# Altium PCB Main PCB.PcbDoc
Units mm, origin at the board's own origin, x right, y up, seen from the top; angles counter-clockwise.
Board outline 76.71 x 60.83 mm, 2 copper layers (Top Layer, Bottom Layer); 25 components, 35 nets, 101 pads, 57 vias.
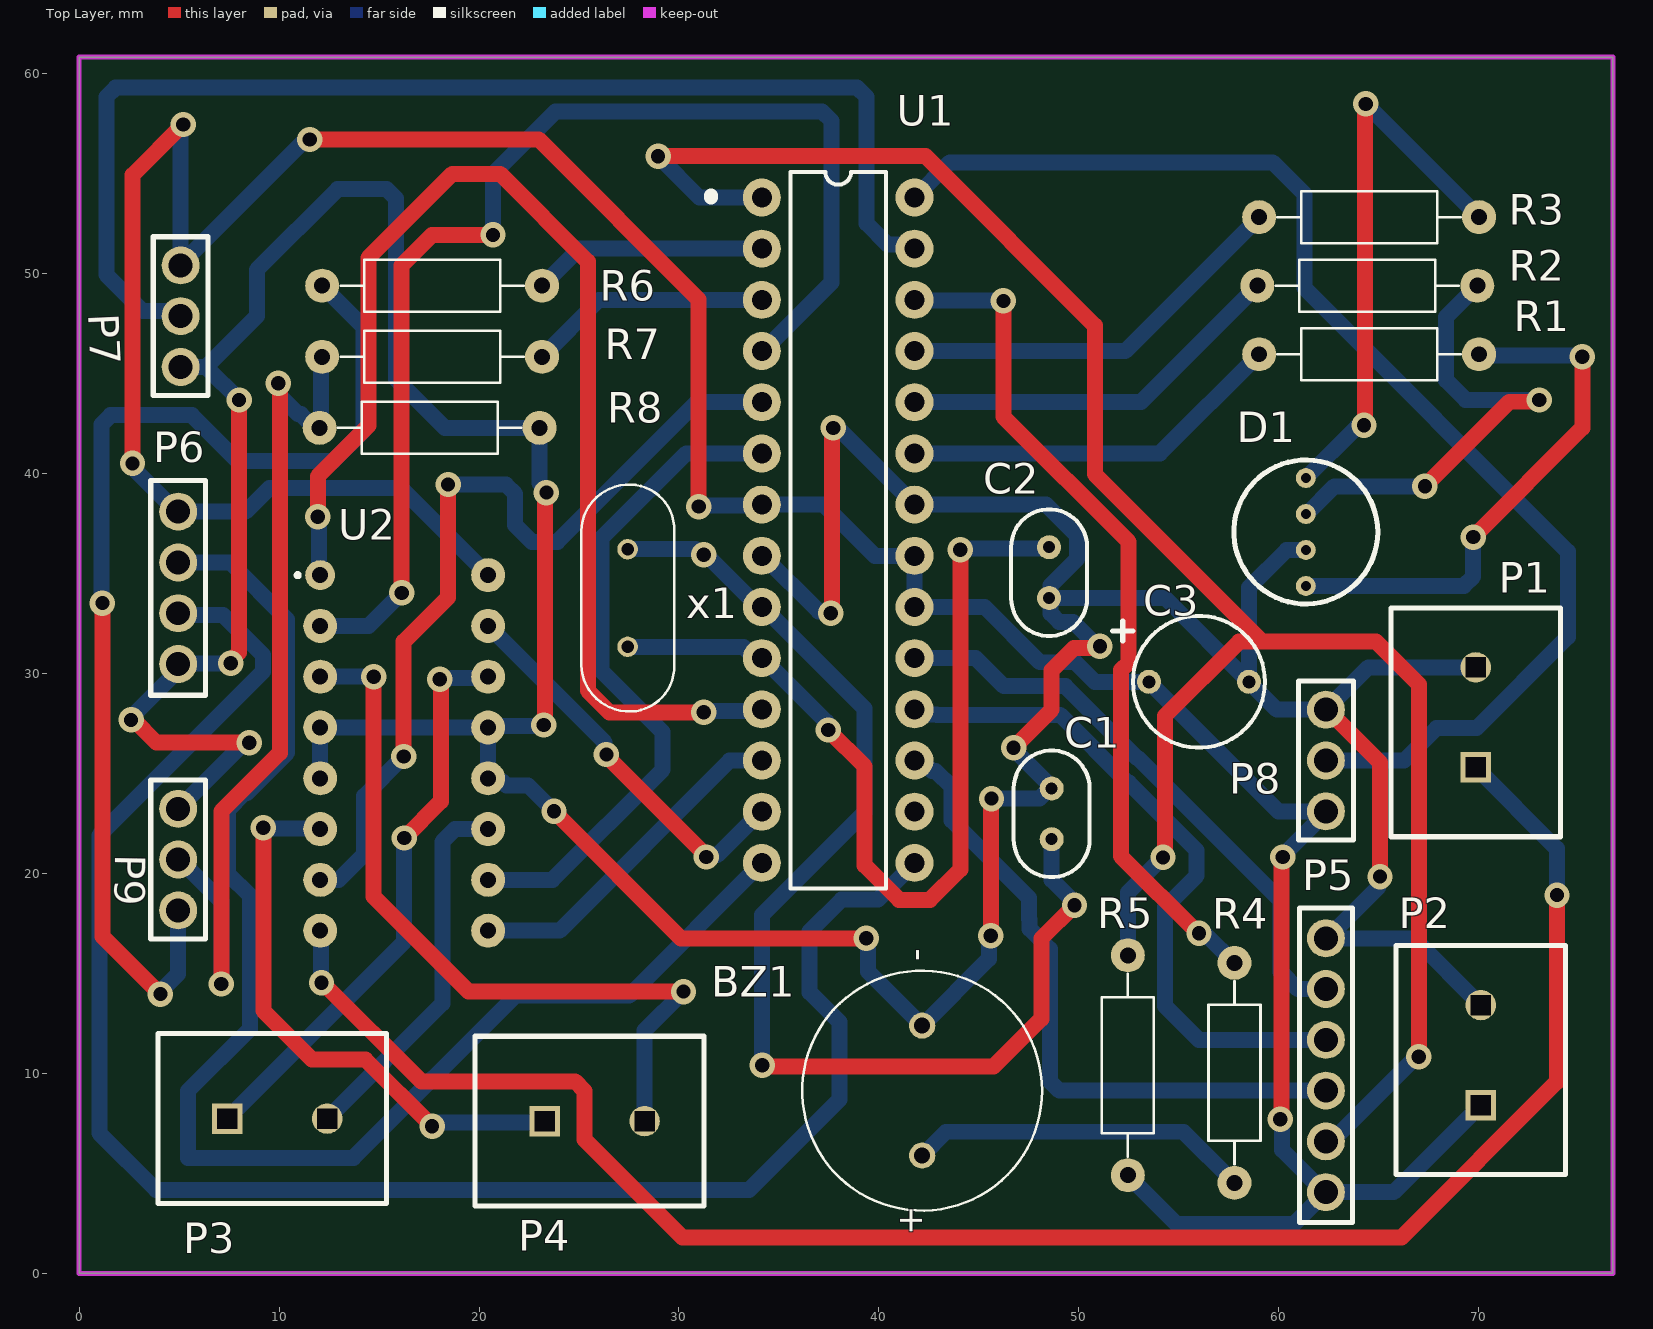
[diagram p0: Top Layer view]
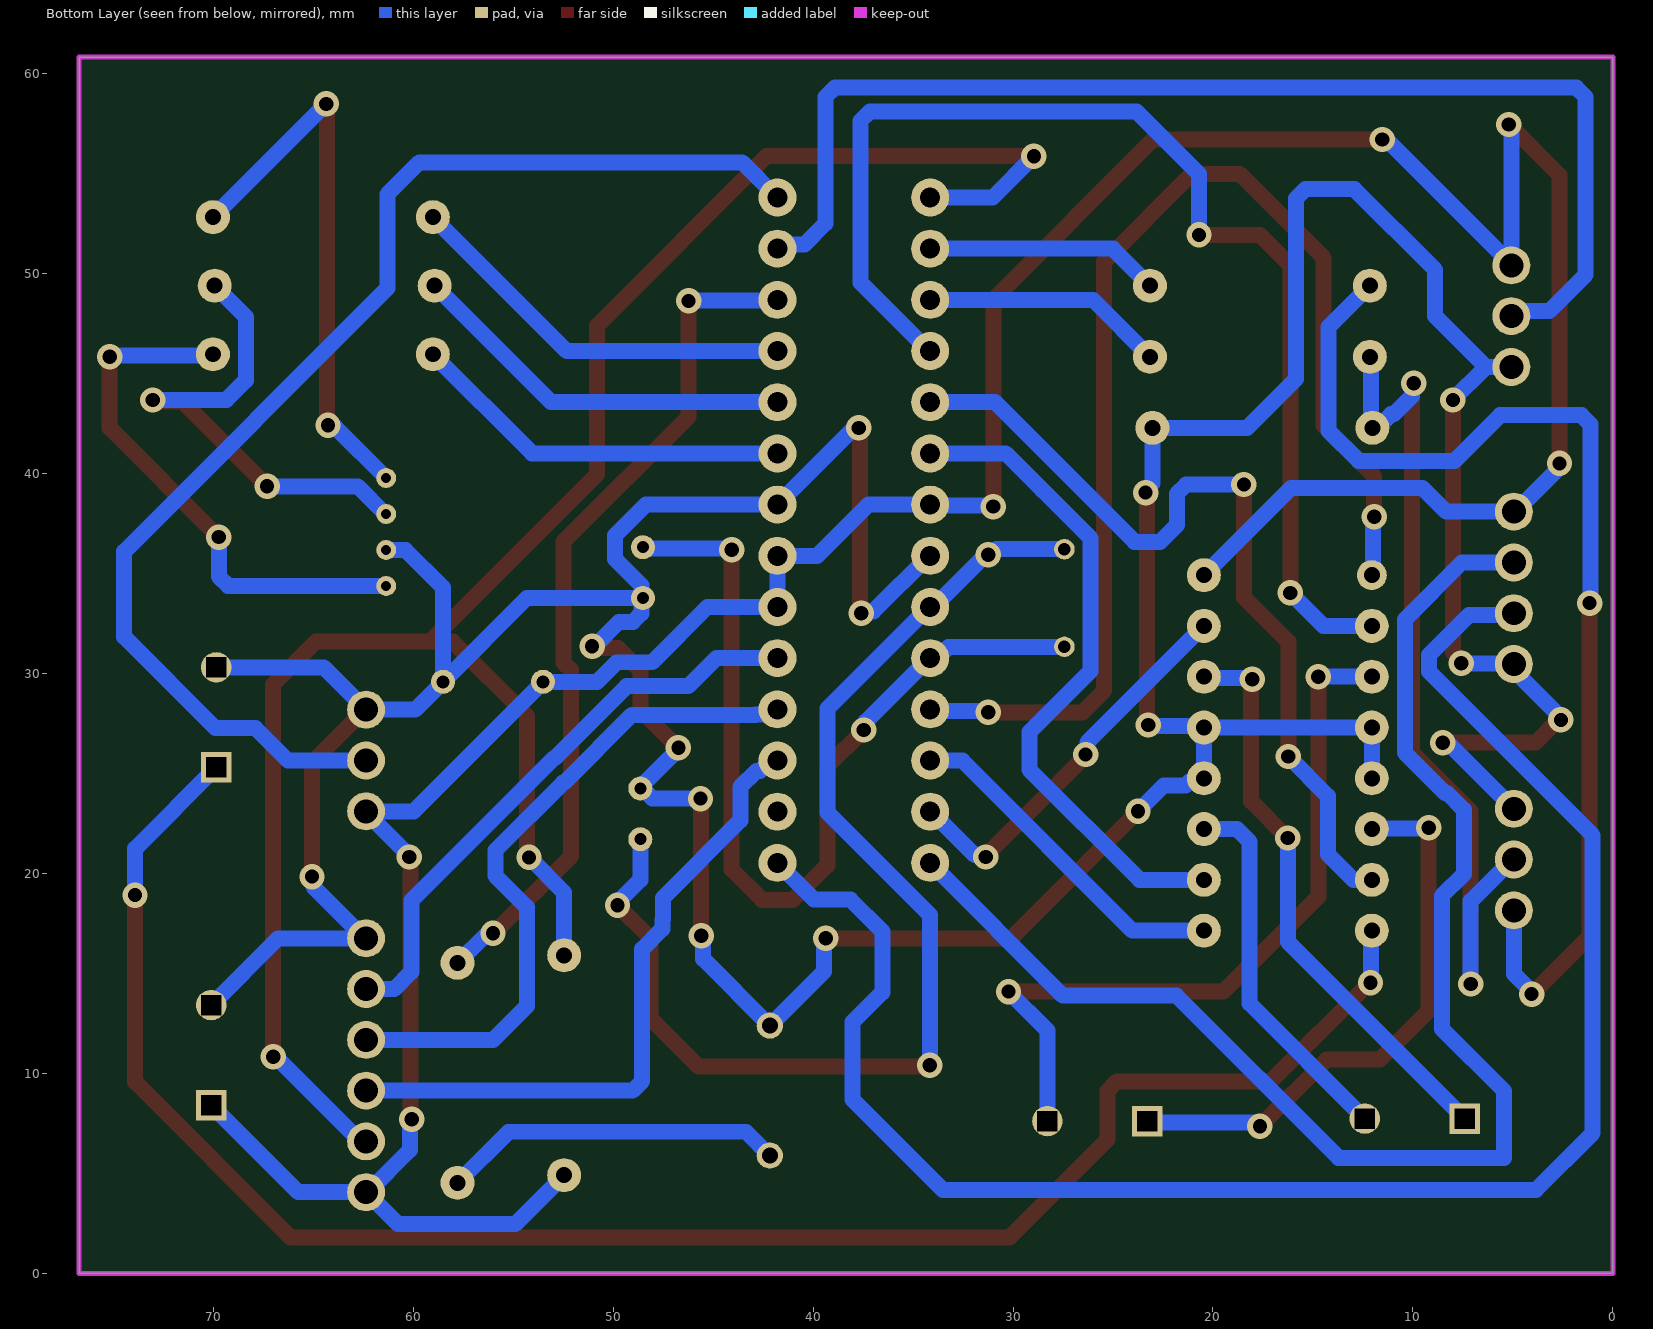
[diagram p1: Bottom Layer view, seen from below]
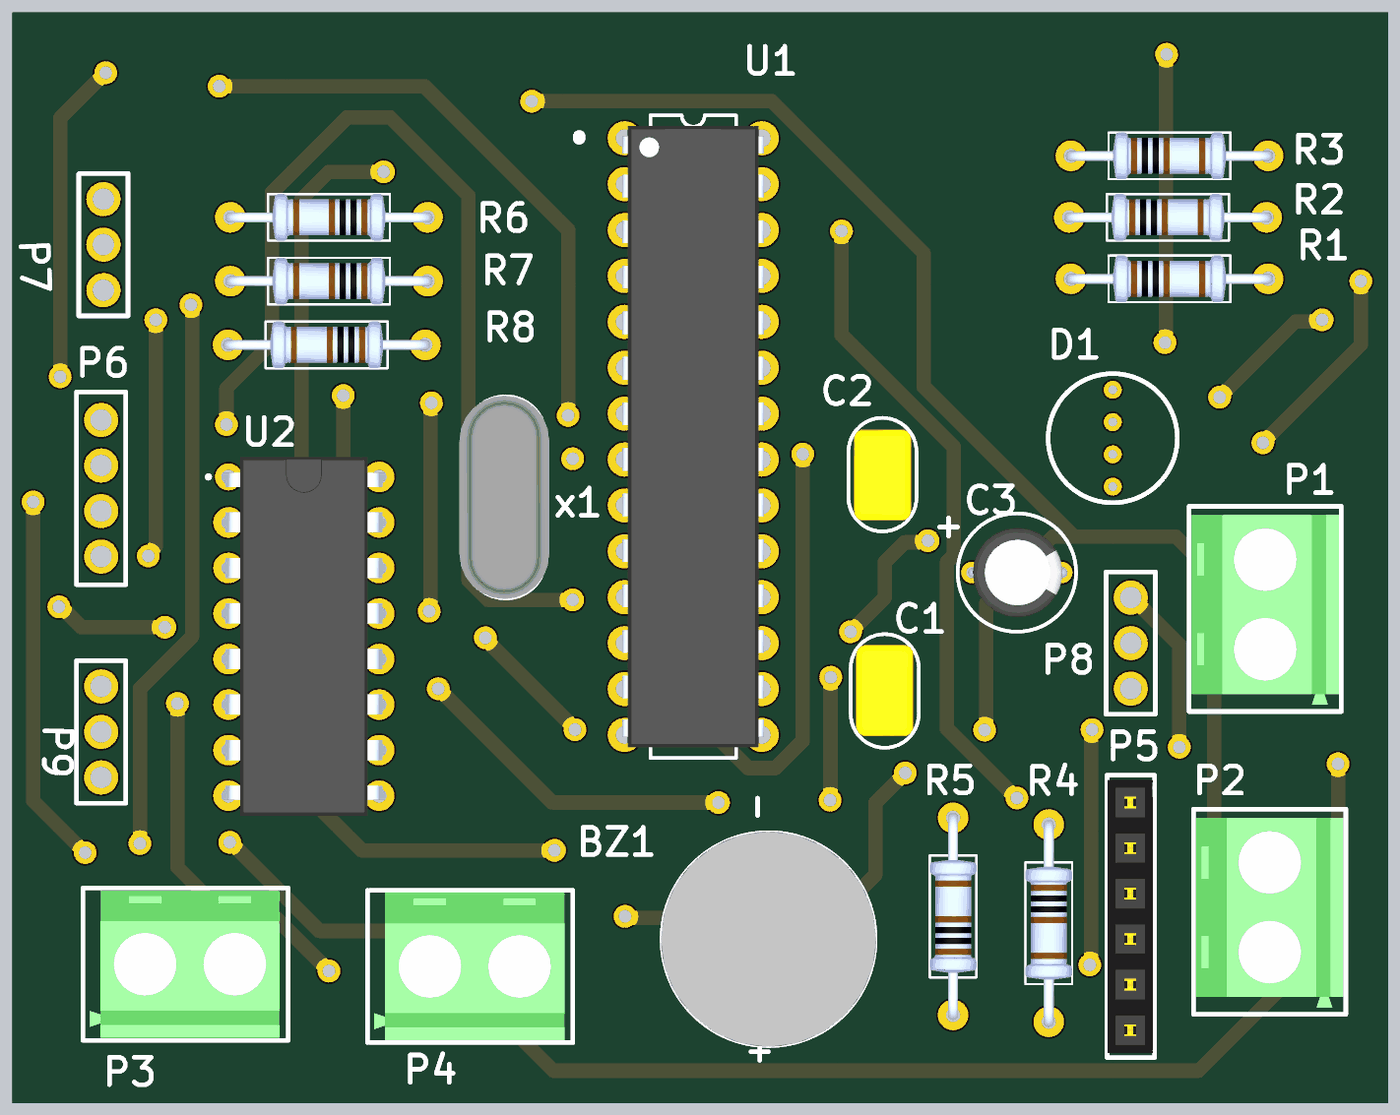
[diagram p2: 3D render of the assembled board from above, using the file's embedded part models]

## Layer stack, top to bottom
Top Solder: solder mask 0.0102, Solder Resist, Dk 3.5
Top Layer: signal copper 0.0356
Dielectric 1: dielectric 0.32, FR-4, Dk 4.8
Bottom Layer: signal copper 0.0356
Bottom Solder: solder mask 0.0102, Solder Resist, Dk 3.5

## Board outline
0,0 0,60.833 76.708,60.833 76.708,0

## Design rules (kind name [scope] priority, off if disabled: settings)
Clearance [All] p1: gap=0.4 ignorepadtopadclearanceinfootprint=FALSE
PolygonConnect [All] p1: connectstyle=Relief reliefconductorwidth=0.254 reliefentries=4 polygonreliefangle="90 Angle" airgapwidth=0.254
RoutingVias [All] p1: holewidth=0.711 width=1.27 viastyle="Through Hole" minholewidth=0.711 minwidth=1.27 maxholewidth=0.711 maxwidth=1.27
SolderMaskExpansion [All] p1: expansion=0.102 istentingtop=FALSE
Width [All] p1: maxlimit=0.8 minlimit=0.8 preferedwidth=0.8 minimp=50.000000 maximp=50.000000 favimp=50.000000
30 further rules are at their usual default settings.

## Components (designator, comment, footprint, x,y, rotation, side; value= is the part's Value field where it differs from the comment)
BZ1 "BUZZER" BUZZER 42.164,9.144 r90 top
C1 "Capacitor" CAPACITOR 48.641,22.987 r270 top
C2 "Capacitor" CAPACITOR 48.514,35.052 r90 top
C3 "Polarized cap" "POL CAP" 56.007,29.591 r0 top
D1 "RGB" RGB 61.352,37.084 r90 top
P1 "Terminal block" "TERMINAL BLOCK" 69.85,27.813 r90 top
P2 "Terminal block" "TERMINAL BLOCK" 70.104,10.922 r90 top
P3 "Terminal block" "TERMINAL BLOCK" 9.906,7.747 r0 top
P4 "Terminal block" "TERMINAL BLOCK" 25.781,7.62 r0 top
P5 "6 pins" "6 Pins connector" 62.357,10.414 r270 top
P6 "4 pins" "4 pins connector" 4.953,34.29 r90 top
P7 "3 pins" "3 pins connector" 5.08,47.879 r270 top
P8 "3 pins" "3 pins connector" 62.357,25.654 r90 top
P9 "3 pins" "3 pins connector" 4.953,20.701 r90 top
R1 "Resistor" RESISTOR 64.516,45.974 r0 top
R2 "Resistor" RESISTOR 64.428,49.403 r0 top
R3 "Resistor" RESISTOR 64.516,52.832 r0 top
R4 "Resistor" RESISTOR 57.785,10.033 r270 top
R5 "Resistor" RESISTOR 52.451,10.414 r90 top
R6 "Resistor" RESISTOR 17.653,49.403 r180 top
R7 "Resistor" RESISTOR 17.653,45.847 r180 top
R8 "Resistor" RESISTOR 17.526,42.291 r180 top
U1 "ATmega328P" ATmega328P 37.963,37.174 r0 top
U2 "L293d" L293d 16.256,26.035 r0 top
x1 "Crystal" CRYSTAL 27.432,33.782 r90 top

## Footprints (in the part's own frame and the unit in brackets; to place one, negate y for a bottom-side part, rotate by r counter-clockwise, add the part's x,y. Pads: shape width x height; smd on the part's side, far side on the other; paste and mask are expansions set on the pad)
"3 pins connector" [mm] "3 pins connector"
  round 1.9 hole 1.2: 1(-2.54,0) 2(0,0) 3(2.54,0)
  silkscreen extent -3.97,-1.37 3.97,1.37
"4 pins connector" [mm] "4 pins connector"
  round 1.9 hole 1.2: 1(-3.81,0) 2(-1.27,0) 3(1.27,0) 4(3.81,0)
  silkscreen extent -5.37,-1.37 5.37,1.37
"6 Pins connector" [mm] "6 pins connector"
  round 1.9 hole 1.2: 1(-6.35,0) 2(-3.81,0) 3(-1.27,0) 4(1.27,0) 5(3.81,0) 6(6.35,0)
  silkscreen extent -7.87,-1.32 7.87,1.32, body extent -7.62,-1.3 7.62,1.24, height 8.7
ATmega328P [mm] "IC base"
  round 1.9 hole 1: 1(-3.82,16.64) 2(-3.82,14.08) 3(-3.82,11.52) 4(-3.82,8.96) 5(-3.82,6.4) 6(-3.82,3.84) 7(-3.82,1.28) 8(-3.82,-1.28) 9(-3.82,-3.84) 10(-3.82,-6.4) 11(-3.82,-8.96) 12(-3.82,-11.52) 13(-3.82,-14.08) 14(-3.82,-16.64) 15(3.82,-16.64) 16(3.82,-14.08) 17(3.82,-11.52) 18(3.82,-8.96) 19(3.82,-6.4) 20(3.82,-3.84) 21(3.82,-1.28) 22(3.82,1.28) 23(3.82,3.84) 24(3.82,6.4) 25(3.82,8.96) 26(3.82,11.52) 27(3.82,14.08) 28(3.82,16.64)
  silkscreen extent -6.36,-17.92 2.39,17.92, body extent -3.95,-17.34 3.95,17.34, height 4.57
BUZZER [mm] "buzzer"
  round 1.308 hole 0.8: M(3.25,0) P(-3.25,0)
  silkscreen extent -6,-6 6,6, body extent -6,-6 6,6, height 10
CAPACITOR [mm] "capacitor"
  round 1.2 hole 0.6: 1(-1.27,0) 2(1.27,0)
  silkscreen extent -3.17,-1.9 3.17,1.9, body extent -2.56,-1.59 2.52,1.59, height 6.08
CRYSTAL [mm] "crystal"
  round 1.03 hole 0.63: 1(-2.44,0) 2(2.44,0)
  silkscreen extent -5.68,-2.33 5.68,2.33, body extent -5.67,-2.5 5.68,2.5, height 13.66
L293d [mm] "L293d motor driver"
  round 1.5 hole 0.8: 1(-4.2,8.89)
  round 1.7 hole 0.8: 2(-4.2,6.35) 3(-4.2,3.81) 4(-4.2,1.27) 5(-4.2,-1.27) 6(-4.2,-3.81) 7(-4.2,-6.35) 8(-4.2,-8.89) 9(4.2,-8.89) 10(4.2,-6.35) 11(4.2,-3.81) 12(4.2,-1.27) 13(4.2,1.27) 14(4.2,3.81) 15(4.2,6.35) 16(4.2,8.89)
  silkscreen extent -5.42,8.79 -5.23,8.99, body extent -4.62,-10 4.62,10, height 5.1
"POL CAP" [mm] "polarized capacitor"
  round 1.2 hole 0.65: 1(-2.5,0) 2(2.5,0)
  silkscreen extent -4.31,-3.3 3.3,3.3, body extent -2.71,-2.5 2.79,2.5, height 12.5
RESISTOR [mm]
  round 1.7 hole 0.8: 1(-5.5,0) 2(5.5,0)
  silkscreen extent -4.58,-1.3 4.58,1.3, body extent -5.77,-1.3 5.77,1.3, height 2.6
RGB [mm] "RGB led indicator"
  round 1 hole 0.5: 1(-2.7,0) 2(-0.9,0) 3(0.9,0) 4(2.7,0)
  silkscreen extent -3.6,-3.6 3.6,3.6
"TERMINAL BLOCK" [mil] "terminal block"
  rect 60x60 hole 39.37 square: 1(-98.43,0)
  round 60 hole 39.37 square: 2(98.43,0)
  silkscreen extent -235,-167 215,167, body extent -220,-161 197,161, height 394

## Via types
v1: diameter 1.27, hole 0.712, Top Layer to Bottom Layer, 57 vias

## Nets (pads, with @x,y where several pads share a name; then routed paths per layer and width w, separated by ;. In a path a pad name is that pad's centre, name@x,y a point inside that pad or via, vN(x,y) a via of type N, cw(c..) or ccw(c..) an arc to the next point about the centre after c; other vN are vias at no path point)
+5: C3.1 P2.1 P5.6 P6.4 P7.1 P8.1 R5.1 U1.7 U1.20 U1.21 U2.16 | length 170.2
  Top Layer w0.8: v1(2.667,40.513) 2.667,54.927 v1(5.207,57.467) ; P6.4@4.889,38.1 P6.4 ; P7.1@5.016,50.482 P7.1 ; v1(11.536,56.716) 22.982,56.716 30.988,48.71 v1(30.988,38.354) ; U1.7@34.093,38.404 U1.7 ; v1(60.071,7.709) 60.134,7.772 60.134,20.764 v1(60.198,20.828) ; P5.6@62.281,4.064 P5.6
  Bottom Layer w0.8: v1(2.667,40.513) 2.757,40.423 2.757,40.233 4.889,38.1 8.328,38.1 9.509,39.281 16.1,39.281 U2.16 ; v1(5.207,57.467) 5.207,57.34 5.08,57.213 P7.1 5.08,50.482 11.224,56.626 11.446,56.626 v1(11.536,56.716) ; v1(30.988,38.354) 31.038,38.404 34.093,38.404 U1.7 37.236,38.454 39.796,35.894 U1.21 U1.20 45.282,33.334 48.047,30.569 49.825,30.569 50.803,29.591 C3.1 59.984,23.114 P8.1 62.357,23.05 60.198,20.892 v1(60.198,20.828) ; R5.1 54.901,2.464 60.757,2.464 P5.6 ; v1(60.071,7.709) 60.161,7.619 60.161,6.184 62.281,4.064 P5.6 ; P2.1 65.746,4.064 P5.6
+12: P1.1 U2.8 | length 91.8
  Top Layer w0.8: U2.8 U2.8@12.061,17.141 ; v1(12.123,14.545) 12.171,14.545 17.115,9.601 24.804,9.601 25.273,9.133 25.273,6.704 30.174,1.803 66.141,1.803 73.914,9.577 v1(73.914,18.923)
  Bottom Layer w0.8: U2.8 12.089,17.112 12.089,14.578 v1(12.123,14.545) ; P1.1 73.914,21.249 v1(73.914,18.923)
ASensor: P8.2 U1.28 | length 63.2
  Bottom Layer w0.8: U1.28 43.544,55.575 59.69,55.575 61.29,53.975 61.29,49.276 74.46,36.106 74.46,31.839 69.901,27.28 67.894,27.28 66.269,25.654 P8.2
BLed: R3.1 U1.25 | length 20
  Bottom Layer w0.8: U1.25 52.318,46.134 R3.1
Buzzer: R4.1 U1.26 | length 42.9
  Top Layer w0.8: U1.26 U1.26@41.81,48.668 ; v1(46.228,48.641) 46.228,42.855 52.489,36.594 52.489,30.553 52.107,30.171 52.107,20.877 55.966,17.018 v1(56.007,17.018)
  Bottom Layer w0.8: U1.26 41.81,48.668 46.201,48.668 v1(46.228,48.641) ; v1(56.007,17.018) 56.097,16.928 56.37,16.928 57.765,15.533 R4.1
Echo: P6.2 U1.15 | length 88.2
  Bottom Layer w0.8: P6.2 5.047,32.926 7.203,32.926 9.206,30.923 9.206,30.11 1.01,21.914 1.01,7.019 3.844,4.185 33.509,4.185 38.03,8.706 38.03,12.568 36.538,14.06 36.538,17.104 38.128,18.695 39.944,18.695 U1.15
EN1: U1.11 U2.1 | length 62.5
  Top Layer w0.8: v1(11.938,37.846) 11.938,39.87 14.47,42.401 14.47,50.789 18.672,54.991 21.057,54.991 25.438,50.61 25.438,29.147 26.518,28.067 v1(31.242,28.067) ; U1.11@33.791,28.214 U1.11
  Bottom Layer w0.8: v1(11.938,37.846) 11.997,37.787 11.997,34.984 U2.1 ; v1(31.242,28.067) 31.316,28.141 34.069,28.141 U1.11
EN2: U1.12 U2.9 | length 17.2
  Bottom Layer w0.8: U2.9 24.028,17.145 32.537,25.654 U1.12
GLed: R2.1 U1.24 | length 19.6
  Bottom Layer w0.8: U1.24 53.099,43.574 R2.1
GND: BZ1.M C1.1 C2.1 C3.2 D1.2 P1.2 P2.2 P5.1 P6.1 P7.3 P8.3 P9.3 R8.1 U1.8 U1.22 U2.4 U2.5 U2.12 U2.13 | length 244.5
  Top Layer w0.8: v1(2.597,27.686) 2.724,27.686 3.867,26.543 v1(8.509,26.543) ; P9.3 P9.3@5.016,23.241 ; v1(7.583,30.517) 7.583,30.644 8.001,31.062 v1(8.001,43.688) ; U2.13 U2.13@20.519,27.368 ; R8.1@23.026,42.047 R8.1 ; v1(23.241,27.432) 23.304,27.495 23.304,38.989 v1(23.368,39.053) ; v1(23.749,23.114) 30.099,16.764 v1(39.37,16.764) ; U1.8 U1.8@34.183,35.854 ; v1(37.592,33.02) 37.655,33.084 37.655,42.227 v1(37.719,42.291) ; BZ1.M BZ1.M@42.265,12.394 ; v1(45.593,16.891) 45.612,16.91 45.612,23.73 v1(45.631,23.749) ; v1(46.736,26.289) 48.641,28.194 48.641,28.864 48.641,28.875 48.641,30.169 49.751,31.279 50.964,31.279 v1(51.054,31.369) ; C2.1 C2.1@48.578,33.718 ; C1.1 C1.1@48.641,24.32 ; P5.1 P5.1@62.42,16.764 ; P8.3 62.433,28.194 65.061,25.566 v1(65.061,19.849)
  Bottom Layer w0.8: v1(2.597,27.686) 2.597,27.813 4.953,30.169 P6.1 4.971,30.498 7.565,30.498 v1(7.583,30.517) ; P9.3 8.165,26.453 8.419,26.453 v1(8.509,26.543) ; P7.3 6.35,45.339 8.89,47.879 8.89,50.19 12.929,54.229 15.381,54.229 15.85,53.76 15.85,44.729 18.288,42.291 R8.1 23.026,39.522 23.368,39.18 v1(23.368,39.053) ; 6.413,45.276 v1(8.001,43.688) ; U2.5 U2.4 U2.13 ; v1(23.241,27.432) 23.177,27.368 20.519,27.368 U2.13 ; v1(23.749,23.114) 22.459,24.404 21.375,24.404 21.185,24.593 20.628,24.593 U2.12 U2.13 ; U1.8 34.199,35.894 36.983,33.11 37.502,33.11 v1(37.592,33.02) ; v1(37.719,42.291) 37.809,42.201 38.036,42.201 U1.22 48.362,38.454 49.914,36.902 49.914,35.742 48.591,34.419 48.591,33.859 C2.1 ; v1(39.37,16.764) 39.46,16.674 39.46,15.098 BZ1.M 45.503,15.733 45.503,16.801 v1(45.593,16.891) ; v1(45.631,23.749) 48.025,23.749 48.596,24.32 48.641,24.32 46.736,26.226 v1(46.736,26.289) ; v1(51.054,31.369) 50.927,31.369 49.714,32.582 49.017,32.582 48.591,33.008 48.591,33.705 C2.1 ; D1.2 60.39,36.184 58.507,34.301 C3.2 ; P5.1 P5.1@62.42,16.764 ; v1(65.061,19.849) 64.971,19.759 64.971,19.315 P5.1@62.42,16.764 ; P1.2 64.476,30.313 P8.3 59.904,28.194 C3.2 ; P2.2 66.762,16.764 P5.1@62.42,16.764 ; C2.1 54.316,33.782 C3.2
IN1: U1.4 U2.2 | length 60.8
  Top Layer w0.8: v1(16.129,34.036) 16.129,50.419 17.653,51.943 v1(20.701,51.943)
  Bottom Layer w0.8: U2.2 14.478,32.385 v1(16.129,34.036) ; v1(20.701,51.943) 20.701,54.991 23.819,58.109 37.161,58.109 37.63,57.64 37.63,49.565 34.199,46.134 U1.4
IN2: U1.5 U2.7 | length 43.7
  Top Layer w0.8: v1(16.231,25.857) 16.231,31.595 18.453,33.817 v1(18.453,39.459)
  Bottom Layer w0.8: U2.7 12.979,19.685 14.249,20.955 14.249,23.876 v1(16.231,25.857) ; v1(18.453,39.459) 21.337,39.459 21.806,38.99 21.806,37.43 22.647,36.589 23.914,36.589 30.899,43.574 U1.5
IN3: U1.6 U2.10 | length 33.6
  Bottom Layer w0.8: U2.10 23.673,19.685 29.185,25.197 29.185,27.073 26.117,30.141 26.117,36.767 28.542,39.192 30.364,41.014 U1.6
IN4: U1.13 U2.15 | length 19.9
  Top Layer w0.8: v1(26.371,25.953) 26.371,25.889 31.369,20.892 v1(31.369,20.828) ; U1.13@34.013,23.094 U1.13
  Bottom Layer w0.8: U2.15 26.281,26.56 26.281,26.043 v1(26.371,25.953) ; v1(31.369,20.828) 31.459,20.918 31.911,20.918 34.087,23.094 U1.13
MISO: P5.3 U1.18 | length 34.2
  Bottom Layer w0.8: U1.18 42.032,27.965 42.876,27.965 42.902,27.94 49.059,27.94 52.453,24.547 52.496,24.547 55.89,21.153 55.89,19.892 54.318,18.321 54.318,13.372 56.006,11.684 P5.3
MOSI: P5.4 U1.17 | length 33.2
  Bottom Layer w0.8: U1.17 42.135,25.654 42.661,25.127 42.838,25.127 43.633,24.333 43.633,22.658 47.504,18.787 47.504,17.728 47.536,17.696 47.536,17.237 48.552,16.221 48.552,9.613 49.021,9.144 P5.4
NetBZ1_P: BZ1.P R4.2 | length 17.2
  Bottom Layer w0.8: BZ1.P 43.357,7.087 55.231,7.087 R4.2
NetD1_1: D1.1 R1.2 | length 27.1
  Top Layer w0.8: D1.1 D1.1@61.39,34.346 ; v1(69.723,36.83) 75.184,42.291 v1(75.184,45.847)
  Bottom Layer w0.8: D1.1 69.254,34.384 69.723,34.853 v1(69.723,36.83) ; R1.2 70.08,45.91 75.12,45.91 v1(75.184,45.847)
NetD1_3: D1.3 R2.2 | length 24.6
  Top Layer w0.8: D1.3 D1.3@61.357,37.979 ; v1(67.31,39.37) 71.538,43.598 72.935,43.598 v1(73.025,43.688) ; R2.2@69.928,49.315 R2.2
  Bottom Layer w0.8: D1.3 61.39,37.984 62.776,39.37 v1(67.31,39.37) ; R2.2 68.366,47.841 68.366,44.664 69.342,43.688 v1(73.025,43.688)
NetD1_4: D1.4 R3.2 | length 28.2
  Top Layer w0.8: D1.4 D1.4@61.39,39.822 ; v1(64.262,42.418) 64.308,42.464 64.308,58.448 v1(64.354,58.494) ; R3.2 R3.2@70.06,52.832
  Bottom Layer w0.8: D1.4 63.896,42.328 64.172,42.328 v1(64.262,42.418) ; v1(64.354,58.494) R3.2
NetP3_1: P3.1 U2.14 | length 28.9
  Top Layer w0.8: v1(16.256,21.777) 18.091,23.612 18.091,29.662 v1(18.034,29.718)
  Bottom Layer w0.8: P3.1 16.256,16.597 v1(16.256,21.777) ; v1(18.034,29.718) 18.098,29.781 20.392,29.781 U2.14
NetP3_2: P3.2 U2.11 | length 18.8
  Bottom Layer w0.8: P3.2 18.161,13.502 18.161,21.59 18.796,22.225 U2.11
NetP4_1: P4.1 U2.6 | length 28.6
  Top Layer w0.8: v1(9.207,22.288) 9.207,13.145 11.655,10.697 14.322,10.697 v1(17.653,7.366)
  Bottom Layer w0.8: v1(9.207,22.288) 9.239,22.257 12.024,22.257 U2.6 ; v1(17.653,7.366) 17.78,7.366 17.971,7.556 22.919,7.556 22.983,7.62 P4.1
NetP4_2: P4.2 U2.3 | length 38.4
  Top Layer w0.8: v1(14.732,29.845) 14.732,18.847 19.482,14.097 v1(30.226,14.097)
  Bottom Layer w0.8: U2.3 v1(14.732,29.845) ; P4.2 28.281,12.152 v1(30.226,14.097)
NetR6_1: R6.1 U1.2 | length 11.8
  Bottom Layer w0.8: R6.1 25.004,51.254 U1.2
NetR7_1: R7.1 U1.3 | length 12.2
  Bottom Layer w0.8: R7.1 26,48.694 U1.3
RESET: P5.5 R5.2 U1.1 | length 103.7
  Top Layer w0.8: v1(28.956,55.88) 42.333,55.88 50.803,47.411 50.803,39.977 59.182,31.598 ; R5.2 R5.2@52.471,15.914 ; v1(54.207,20.806) 54.297,20.896 54.297,27.881 58.014,31.598 59.182,31.598 ; P5.5 P5.5@62.42,6.667 ; v1(67.004,10.832) 67.004,29.465 64.872,31.598 59.182,31.598
  Bottom Layer w0.8: v1(28.956,55.88) 31.022,53.814 U1.1 ; R5.2 52.451,19.05 v1(54.207,20.806) ; P5.5 62.649,6.604 66.877,10.832 v1(67.004,10.832)
RLed: R1.1 U1.23 | length 19.3
  Bottom Layer w0.8: U1.23 54.056,41.014 R1.1
Rx: P9.1 R6.2 | length 57.4
  Top Layer w0.8: v1(1.162,33.528) 1.162,16.856 4.048,13.97 v1(4.064,13.97) ; P9.1@4.889,18.224 P9.1
  Bottom Layer w0.8: v1(1.162,33.528) 1.105,33.585 1.105,42.457 1.574,42.926 5.633,42.926 7.918,40.641 12.709,40.641 14.224,42.156 14.224,47.332 R6.2 ; v1(4.064,13.97) 4.064,14.097 4.953,14.986 P9.1
SCK: P5.2 U1.19 | length 29.5
  Bottom Layer w0.8: U1.19 44.842,30.774 46.247,29.369 49.328,29.369 52.95,25.747 52.993,25.747 60.096,18.644 60.096,15.088 60.96,14.224 P5.2
Trig: P6.3 U1.14 | length 71.4
  Bottom Layer w0.8: P6.3 7.544,35.56 10.406,32.698 10.406,26.046 8.401,24.041 8.296,24.041 7.455,23.2 7.455,19.972 8.547,18.88 8.547,12.23 5.444,9.127 5.444,5.785 13.716,5.785 21.825,13.894 27.503,13.894 U1.14
Tx: P9.2 R7.2 R8.2 | length 45.5
  Top Layer w0.8: v1(7.112,14.478) 7.112,23.117 10.033,26.038 10.033,44.45 v1(9.959,44.524) ; R8.2@11.962,42.227 R8.2
  Bottom Layer w0.8: P9.2 5.029,20.701 7.112,18.618 v1(7.112,14.478) ; v1(9.959,44.524) 10.049,44.434 10.049,43.885 10.95,42.983 11.09,42.983 11.782,42.291 R8.2 12.089,42.355 12.089,45.783 R7.2
VSensor: P7.2 U1.27 | length 61.1
  Bottom Layer w0.8: P7.2 4.831,48.128 3.183,48.128 1.359,49.952 1.359,58.84 1.828,59.309 38.912,59.309 39.381,58.84 39.381,52.513 40.421,51.473 41.564,51.473 U1.27
XTAL1: C1.2 U1.9 x1.2 | length 60.3
  Top Layer w0.8: v1(34.163,10.414) 34.239,10.338 45.72,10.338 48.12,12.738 48.12,16.751 v1(49.784,18.415) ; C1.2 C1.2@48.718,21.64
  Bottom Layer w0.8: x1.2 30.834,36.222 31.115,35.941 31.369,35.941 33.976,33.334 34.199,33.334 39.281,28.252 39.281,23.056 34.163,17.938 v1(34.163,10.414) ; C1.2 48.641,19.685 49.784,18.542 v1(49.784,18.415)
  other v1: 31.242,35.941
XTAL2: C2.2 U1.10 x1.1 | length 46.3
  Top Layer w0.8: U1.10 U1.10@34.199,30.774 ; v1(37.465,27.178) 39.286,25.357 39.286,20.415 41.017,18.684 42.549,18.684 44.069,20.204 v1(44.069,36.195)
  Bottom Layer w0.8: x1.1 33.223,31.342 33.791,30.774 U1.10 ; U1.10@34.074,30.899 37.375,27.598 37.375,27.268 v1(37.465,27.178) ; v1(44.069,36.195) 44.133,36.258 48.45,36.258 C2.2
pads on no net: U1.16

## Keep-outs
Keep-Out Layer:
  the board outline again, w0.254

## Text inside footprints (layer, text, board x,y; h text height)
BZ1: Top Overlay "-" at 42.418,15.621 h1.27 r90; Top Overlay "+" at 42.164,1.914 h1.28 r90